# EAGLE board Eval_autorouter (EAGLE 6.6.0)
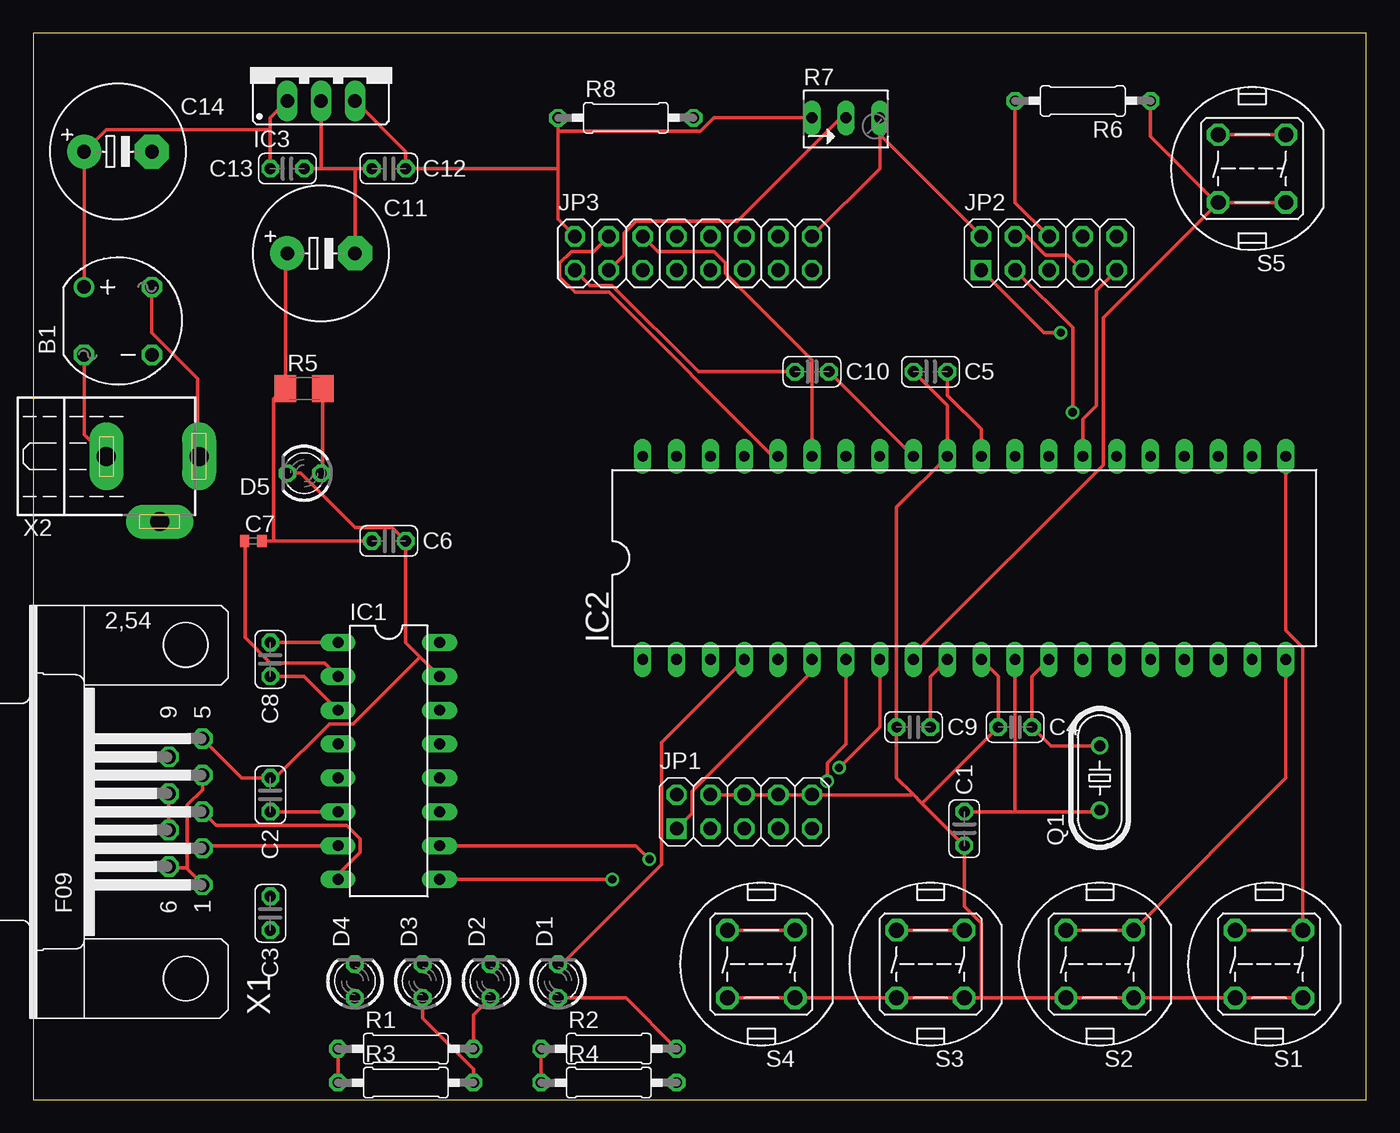
[diagram p0: board, top side]
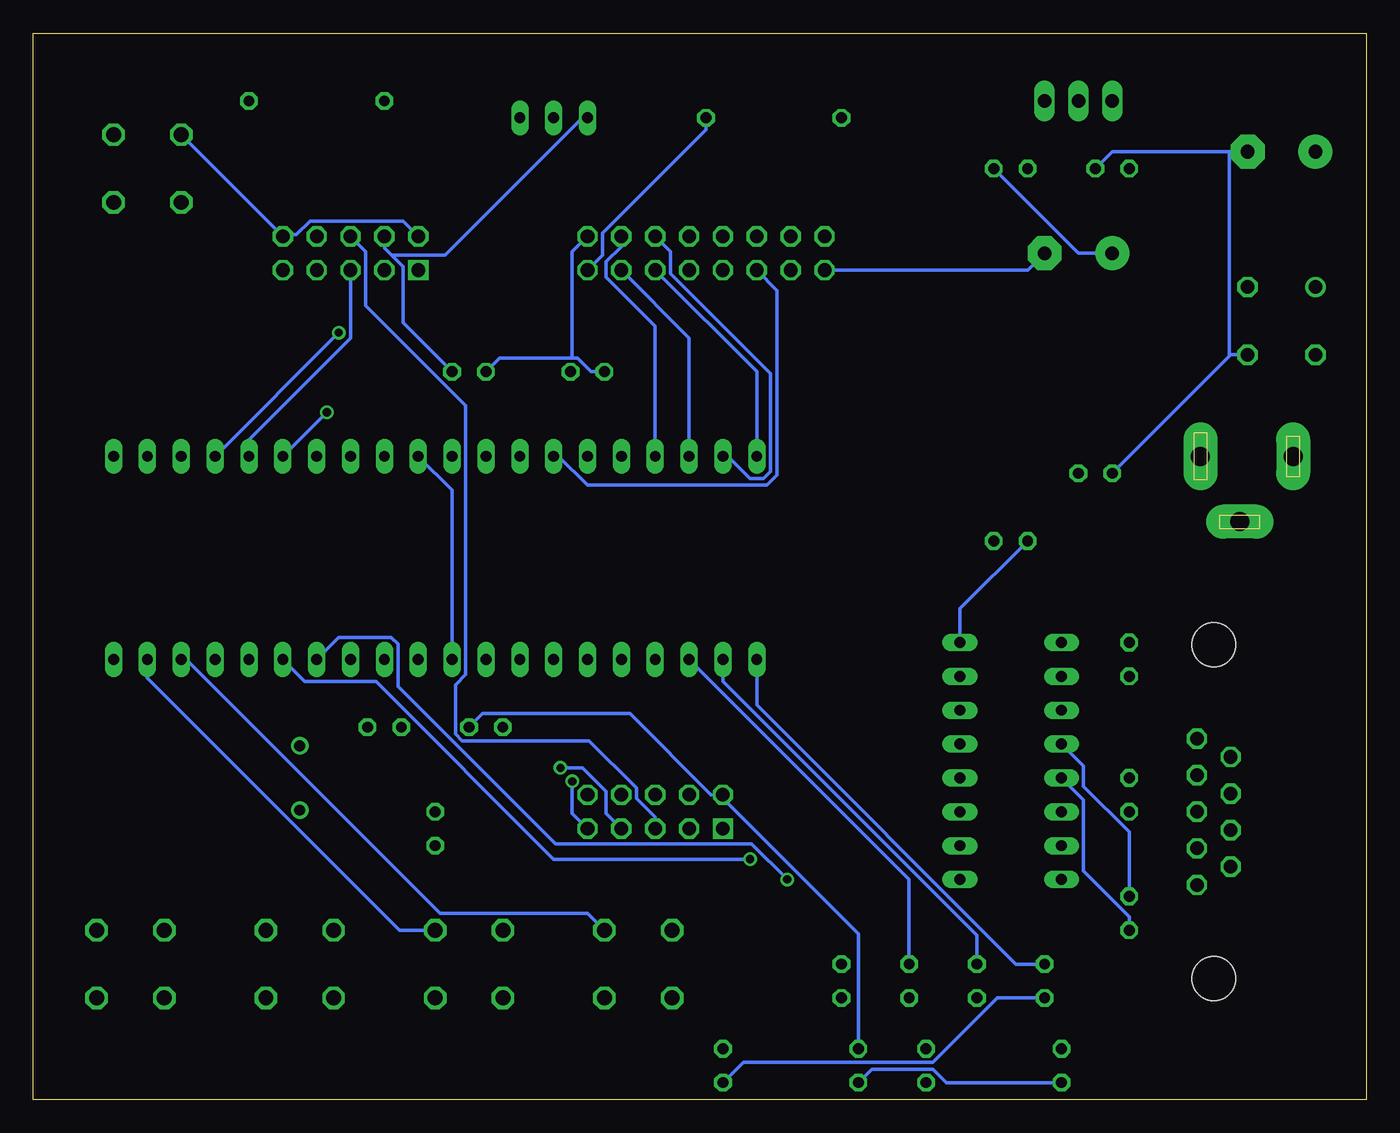
[diagram p1: board, bottom side, seen from below]

Size 100 x 80 mm. Coordinates in mm from the lower left corner, seen from the top.
Outline: 0,0 100,0 100,80 0,80 0,0
Copper layers (1*16): Top 0.035mm / dielectric 1.5mm / Bottom 0.035mm
Design rules "default": minimum track width 10mil, minimum drill 24mil, track to track 8mil, track to pad 8mil, pad to pad 8mil, via to via 8mil, smd to smd 8mil, copper to edge 40mil, drill to drill 8mil, minimum pad ring 10mil, minimum via ring 8mil, stop-mask expansion 4mil, vias tented up to drill 0mil, thermal gap 10mil
Net classes: 1 pup: width 1 mm, drill 0.254 mm

## Footprints (pad centres in the part's own frame; a part is rotated, then mirrored left to right if it is on the bottom)
RB1A = drill 1.016: + -2.54,2.54 | drill 1.016 octagon: - 2.54,-2.54; AC1 2.54,2.54; AC2 -2.54,-2.54
C025-024X044 = drill 0.813 octagon: 1 -1.27,0; 2 1.27,0
C0402 = smd 0.7 x 0.9: 1 -0.65,0; 2 0.65,0
E5-10,5 = drill 1.016 pad 2.54: + -2.54,0 | drill 1.016 pad 2.54 octagon: - 2.54,0
LED3MM = drill 0.813 octagon: A -1.27,0; K 1.27,0
DIL16 = drill 0.813 long: 1 -8.89,-3.81; 2 -6.35,-3.81; 3 -3.81,-3.81; 4 -1.27,-3.81; 5 1.27,-3.81; 6 3.81,-3.81; 7 6.35,-3.81; 8 8.89,-3.81; 9 8.89,3.81; 10 6.35,3.81; 11 3.81,3.81; 12 1.27,3.81; 13 -1.27,3.81; 14 -3.81,3.81; 15 -6.35,3.81; 16 -8.89,3.81
DIL40 = drill 0.813 long: 1 -24.13,-7.62; 2 -21.59,-7.62; 3 -19.05,-7.62; 4 -16.51,-7.62; 5 -13.97,-7.62; 6 -11.43,-7.62; 7 -8.89,-7.62; 8 -6.35,-7.62; 9 -3.81,-7.62; 10 -1.27,-7.62; 11 1.27,-7.62; 12 3.81,-7.62; 13 6.35,-7.62; 14 8.89,-7.62; 15 11.43,-7.62; 16 13.97,-7.62; 17 16.51,-7.62; 18 19.05,-7.62; 19 21.59,-7.62; 20 24.13,-7.62; 21 24.13,7.62; 22 21.59,7.62; 23 19.05,7.62; 24 16.51,7.62; 25 13.97,7.62; 26 11.43,7.62; 27 8.89,7.62; 28 6.35,7.62; 29 3.81,7.62; 30 1.27,7.62; 31 -1.27,7.62; 32 -3.81,7.62; 33 -6.35,7.62; 34 -8.89,7.62; 35 -11.43,7.62; 36 -13.97,7.62; 37 -16.51,7.62; 38 -19.05,7.62; 39 -21.59,7.62; 40 -24.13,7.62
78XXS = drill 1.016 long: GND 0,-2.54; IN -2.54,-2.54; OUT 2.54,-2.54
2X05 = drill 1.016 square: 1 -5.08,-1.27 | drill 1.016 octagon: 2 -5.08,1.27; 3 -2.54,-1.27; 4 -2.54,1.27; 5 0,-1.27; 6 0,1.27; 7 2.54,-1.27; 8 2.54,1.27; 9 5.08,-1.27; 10 5.08,1.27
2X08 = drill 1.016 octagon: 1 -8.89,-1.27; 2 -8.89,1.27; 3 -6.35,-1.27; 4 -6.35,1.27; 5 -3.81,-1.27; 6 -3.81,1.27; 7 -1.27,-1.27; 8 -1.27,1.27; 9 1.27,-1.27; 10 1.27,1.27; 11 3.81,-1.27; 12 3.81,1.27; 13 6.35,-1.27; 14 6.35,1.27; 15 8.89,-1.27; 16 8.89,1.27
HC49/S = drill 0.813: 1 -2.413,0; 2 2.413,0
0207/10@1 = drill 0.813 octagon: 1 -5.08,0; 2 5.08,0
M1206 = smd 1.6 x 2: 1 -1.4,0; 2 1.4,0
B64Y = drill 0.813 long: A 2.54,0; E -2.54,0; S 0,0
DTE6 = drill 1.118 octagon: 1 -2.54,2.54; 2 2.54,2.54; 3 2.54,-2.54; 4 -2.54,-2.54
F09H = drill 1.016 octagon: 1 -5.486,-1.27; 2 -2.743,-1.27; 3 0,-1.27; 4 2.743,-1.27; 5 5.486,-1.27; 6 -4.115,1.27; 7 -1.372,1.27; 8 1.372,1.27; 9 4.115,1.27 | hole 3.302: -12.522,0; 12.522,0
NEB21R = drill 1.422 pad 2.54 long: + 0,7.35; - 0,0.398; C 4.9,4.4

## Placement (x,y rotation side)
B1  [RB1A]  6.35,58.42 0 top
C1  33pF  [C025-024X044]  69.85,20.32 90 top
C2  100nF  [C025-024X044]  17.78,22.86 270 top
C3  100nF  [C025-024X044]  17.78,13.97 270 top
C4  33pF  [C025-024X044]  73.66,27.94 0 top
C5  100nF  [C025-024X044]  67.31,54.61 0 top
C6  100nF  [C025-024X044]  26.67,41.91 0 top
C7  100nF  [C0402]  16.51,41.91 0 top
C8  100nF  [C025-024X044]  17.78,33.02 270 top
C9  100nF  [C025-024X044]  66.04,27.94 0 top
C10  100nF  [C025-024X044]  58.42,54.61 0 top
C11  470u/25V  [E5-10,5]  21.59,63.5 0 top
C12  100nF  [C025-024X044]  26.67,69.85 0 top
C13  100nF  [C025-024X044]  19.05,69.85 180 top
C14  470u/25V  [E5-10,5]  6.35,71.12 0 top
D1  Red  [LED3MM]  39.37,8.89 90 top
D2  Red  [LED3MM]  34.29,8.89 90 top
D3  Red  [LED3MM]  29.21,8.89 90 top
D4  Red  [LED3MM]  24.13,8.89 90 top
D5  Green  [LED3MM]  20.32,46.99 180 top
IC1  MAX232  [DIL16]  26.67,25.4 270 top
IC2  MEGA16-P  [DIL40]  69.85,40.64 0 top
IC3  7805  [78XXS]  21.59,77.47 0 top
JP1  2x5  [2X05]  53.34,21.59 0 top
JP2  2x5  [2X05]  76.2,63.5 0 top
JP3  2x8  [2X08]  49.53,63.5 0 top
Q1  16MHz  [HC49/S]  80.01,24.13 90 top
R1  220R  [0207/10@1]  27.94,3.81 0 top
R2  220R  [0207/10@1]  43.18,3.81 0 top
R3  220R  [0207/10@1]  27.94,1.27 0 top
R4  220R  [0207/10@1]  43.18,1.27 0 top
R5  220R  [M1206]  20.32,53.34 0 top
R6  510R  [0207/10@1]  78.74,74.93 180 top
R7  10k  [B64Y]  60.96,73.66 0 top
R8  22R  [0207/10@1]  44.45,73.66 0 top
S1  DTE6  [DTE6]  92.71,10.16 180 top
S2  DTE6  [DTE6]  80.01,10.16 180 top
S3  DTE6  [DTE6]  67.31,10.16 180 top
S4  DTE6  [DTE6]  54.61,10.16 180 top
S5  DTE6  [DTE6]  91.44,69.85 180 top
X1  [F09H]  11.43,21.59 90 top
X2  [NEB21R]  5.08,48.26 270 top

## Library data of the parts
B1 = rectifier
C1-C14 R1-R6 R8 = rcl
D1-D5 = led
IC1 = maxim
IC2 = avr
IC3 = v-reg
JP1-JP3 = pinhead
Q1 = crystal
R7 = pot
S1-S5 = switch-misc
X1 = con-subd
X2 = con-lumberg

## Nets
+5V: C5.2 C6.1 C7.2 C9.2 C11.+ C12.2 IC1.16 IC2.10 IC2.30 IC3.OUT JP1.2 JP2.4 JP2.7 JP3.2 R1.1 R2.1 R3.1 R4.1 R5.1 R7.E R8.1
/RESET: IC2.9 R6.1 S5.1 S5.2
/RESET_ISP: JP1.5 JP2.6 R6.2
DB4: IC2.40 JP3.11
DB5: IC2.39 JP3.12
DB6: IC2.38 JP3.13
DB7: IC2.37 JP3.14
E: IC2.35 JP3.6
GND: B1.- C1.1 C2.1 C4.1 C5.1 C6.2 C9.1 C10.1 C11.- C12.1 C13.1 C14.- D5.K IC1.15 IC2.11 IC2.31 IC3.GND JP1.4 JP1.6 JP1.8 JP1.10 JP2.2 JP2.10 JP3.1 JP3.16 R7.A S1.1 S1.2 S2.1 S2.2 S3.1 S3.2 S4.1 S4.2 S5.3 S5.4 X1.5
LED0: D4.K IC2.1
LED1: D3.K IC2.2
LED2: D2.K IC2.3
LED3: D1.K IC2.4
LED-A: JP3.15 R8.2
MISO: IC2.7 JP1.9
MOSI: IC2.6 JP1.1
N$1: D4.A R4.2
N$2: D3.A R3.2
N$3: D2.A R1.2
N$4: D1.A R2.2
N$5: C10.2 IC2.32
N$8: C2.2 IC1.6
N$9: C7.1 IC1.2
N$21: C3.2 IC1.5
N$23: C3.1 IC1.4
N$24: C8.2 IC1.3
N$25: C8.1 IC1.1
N$29: C4.2 IC2.13 Q1.2
N$30: C1.2 IC2.12 Q1.1
N$44: X1.1 X1.4 X1.6
N$45: D5.A R5.2
N$46: B1.AC2 X2.-
N$47: X1.7 X1.8
N$68: B1.AC1 X2.+
N$73: B1.+ C13.2 C14.+ IC3.IN
R/W: IC2.34 JP3.5
RS: IC2.36 JP3.4
RS232-RX0: IC1.8 X1.3
RS232-TX0: IC1.7 X1.2
RXD0: IC1.9 IC2.14
SCK: IC2.8 JP1.7
SW4: IC2.18 S4.3 S4.4
SW5: IC2.19 S3.3 S3.4
SW6: IC2.20 S2.3 S2.4
SW7: IC2.21 S1.3 S1.4
TCK: IC2.24 JP2.1
TDI: IC2.27 JP2.9
TDO: IC2.26 JP2.3
TMS: IC2.25 JP2.5
TXD0: IC1.10 IC2.15
V0: JP3.3 R7.S

## Tracks (layer width: path | path; a pad name or v marks a point on that pad's centre or on a via)
+5V
  Top 0.254: C6.1 18.03,41.91 | 18.03,41.91 C7.2 | C11.+ 18.92,63.37 R5.1 18.8,53.34 18.03,52.58 18.03,41.91 | IC3.OUT 27.94,71.12 C12.2 39.37,69.85 | 39.37,69.85 39.37,66.04 JP3.2 | 39.37,69.85 39.37,72.64 | 39.37,72.64 R8.1 | R7.E 51.05,73.66 50.04,72.64 39.37,72.64 | R1.1 R3.1 | R2.1 R4.1 | JP2.4 74.55,64.77 75.95,63.37 77.6,63.37 JP2.7 | C9.2 67.31,31.75 IC2.10 | C5.2 68.58,52.83 71.12,50.29 IC2.30
  Bottom 0.254: IC1.16 30.48,36.83 C6.1 | C11.+ 21.59,63.5 C12.2 | R2.1 38.1,12.45 48.26,22.61 JP1.2 49.15,22.86 55.24,28.96 66.29,28.96 C9.2 | R3.1 31.5,1.27 32.51,2.29 37.08,2.29 R4.1 | IC2.10 68.58,45.72 IC2.30 | JP2.4 73.66,63.88 73.09,63.31 | 73.09,63.31 72.26,62.48 72.26,58.29 C5.2 | R7.E 58.8,73.66 69.09,63.37 73.03,63.37 73.09,63.31
/RESET
  Top 0.254: IC2.9 66.04,33.4 80.26,47.62 80.26,58.67 S5.2 | R6.1 83.82,72.26 88.77,67.31 S5.2 | S5.2 S5.1
/RESET_ISP
  Top 0.254: R6.2 73.66,67.31 JP2.6
  Bottom 0.254: JP1.5 53.34,21.21 54.74,22.61 54.74,23.37 58.29,26.92 67.82,26.92 68.33,27.43 68.33,31.11 67.56,31.88 67.56,52.07 75.06,59.56 75.06,63.63 JP2.6
DB4
  Bottom 0.254: IC2.40 45.72,54.61 JP3.11
DB5
  Bottom 0.254: IC2.39 47.88,48.26 46.23,46.61 45.21,46.61 44.7,47.12 44.7,54.48 52.2,61.98 52.2,63.63 JP3.12
DB6
  Bottom 0.254: IC2.38 50.8,57.15 JP3.13
DB7
  Bottom 0.254: IC2.37 53.34,58.04 57.02,61.72 57.02,62.87 55.88,64.01 JP3.14
E
  Top 0.254: IC2.35 58.42,55.5 51.94,61.98 51.94,62.74 51.05,63.63 46.86,63.63 JP3.6
GND
  Top 0.254: JP1.4 JP1.6 JP1.8 JP1.10 65.91,22.86 65.98,22.92 | IC2.11 72.39,31.75 C4.1 66.67,22.23 | 66.67,22.23 C1.1 69.85,14.48 71.12,13.21 71.12,7.62 | 66.67,22.23 65.98,22.92 | 65.98,22.92 64.77,24.13 C9.1 64.77,44.45 IC2.31 68.58,52.07 C5.1 | S1.1 S1.2 S2.1 S2.2 71.12,7.62 | S4.2 S4.1 S3.2 S3.1 71.12,7.62 | S5.3 S5.4 | 63.5,72.39 63.5,69.85 JP3.16 | 63.5,72.39 JP2.2 | 63.5,72.39 R7.A | C12.1 24.13,69.85 | 24.13,69.85 21.59,69.85 | 21.59,69.85 C13.1 | 21.59,69.85 IC3.GND | 24.13,69.85 C11.- | X1.5 12.7,27.05 15.62,24.13 C2.1 18.16,24.13 22.23,28.19 24,28.19 29.02,33.21 | IC1.15 29.02,33.21 | 29.02,33.21 27.94,34.29 C6.2 26.92,42.93 24.13,42.93 20.07,46.99 D5.K | C10.1 49.91,54.61 43.43,61.09 41.78,61.09 JP3.1
  Bottom 0.254: S5.3 JP2.10 81.28,64.9 80.26,64.9 79.25,65.91 72.26,65.91 JP2.2 | C10.1 58.17,54.61 59.18,55.63 59.56,55.63 | 59.56,55.63 65.02,55.63 C5.1 | 59.56,55.63 59.56,63.63 JP3.16 | JP3.1 25.4,62.23 C11.- | 10.29,71.12 19.05,71.12 C13.1 | 10.29,71.12 C14.- | B1.- 10.16,55.88 10.22,55.82 | D5.K 10.22,55.82 | 10.29,71.12 10.29,55.88 10.22,55.82
LED0
  Bottom 0.254: D4.K 26.29,10.16 45.72,29.59 IC2.1
LED1
  Bottom 0.254: D3.K 29.21,12.32 48.26,31.37 IC2.2
LED2
  Bottom 0.254: D2.K 34.29,16.51 IC2.3
LED3
  Top 0.254: D1.K 39.62,10.16 47.12,17.65 47.12,26.8 IC2.4
LED-A
  Bottom 0.254: R8.2 49.53,72.77 57.28,65.02 57.28,63.37 JP3.15
MISO  (via drill 0.61)
  Top 0.254: IC2.7 60.96,26.67 59.56,25.27 v59.56,23.88
  Bottom 0.254: v59.56,23.88 59.56,21.46 JP1.9
MOSI
  Top 0.254: IC2.6 58.42,32.13 49.4,23.11 49.4,21.46 JP1.1
N$1
  Bottom 0.254: D4.A 27.69,7.62 32.51,2.79 46.74,2.79 R4.2
N$2
  Top 0.254: R3.2 33.02,2.29 29.21,6.1 D3.A
N$3
  Top 0.254: R1.2 33.02,6.35 D2.A
N$4
  Top 0.254: D1.A 44.45,7.62 R2.2
N$5
  Top 0.254: IC2.32 C10.2
N$8
  Top 0.254: IC1.6 C2.2
N$9
  Top 0.254: IC1.2 21.84,32.77 17.78,32.77 15.88,34.67 15.88,41.91 C7.1
N$21
  Bottom 0.254: C3.2 17.78,13.72 21.21,17.14 21.21,22.48 IC1.5
N$23
  Bottom 0.254: C3.1 17.78,20.07 21.21,23.5 21.21,25.02 IC1.4
N$24
  Top 0.254: C8.2 20.32,31.75 IC1.3
N$25
  Top 0.254: IC1.1 C8.1
N$29
  Top 0.254: IC2.13 74.93,31.75 C4.2 76.33,26.54 Q1.2
N$30
  Top 0.254: 73.66,21.59 79.88,21.59 Q1.1 | 73.66,21.59 C1.2 | 73.66,21.59 IC2.12
N$44
  Top 0.254: 11.49,17.34 12.7,16.13 X1.1 | 11.49,17.34 11.43,17.4 10.16,17.4 X1.6 | X1.4 12.7,23.24 11.56,22.1 11.56,17.4 11.49,17.34
N$45
  Top 0.254: D5.A 21.72,47.12 R5.2
N$46
  Top 0.254: B1.AC2 3.81,49.91 5.46,48.26 X2.-
N$47
  Top 0.254: X1.8 X1.7
N$68
  Top 0.254: B1.AC1 8.89,57.53 12.32,54.1 12.32,48.26 X2.+
N$73
  Top 0.254: 17.78,72.77 17.78,73.66 IC3.IN | 17.78,72.77 C13.2 | B1.+ C14.+ 5.46,72.77 17.78,72.77
R/W
  Bottom 0.254: IC2.34 60.58,48.26 58.42,46.1 44.96,46.1 44.2,46.86 44.2,60.71 JP3.5
RS
  Top 0.254: IC2.36 55.5,48.26 43.18,60.58 40.64,60.58 39.5,61.72 39.5,62.74 40.39,63.63 42.04,63.63 JP3.4
RS232-RX0
  Top 0.254: IC1.8 22.86,16.89 24.51,18.54 24.51,19.56 23.5,20.57 13.72,20.57 X1.3
RS232-TX0
  Top 0.254: IC1.7 12.83,19.05 12.7,18.92 X1.2
RXD0  (via drill 0.61)
  Top 0.254: v43.43,16.51 IC1.9
  Bottom 0.254: v43.43,16.51 46.1,19.18 60.83,19.18 72.64,30.99 72.64,34.16 73.15,34.67 77.09,34.67 IC2.14
SCK  (via drill 0.61)
  Top 0.254: IC2.8 63.5,27.94 v60.45,24.89
  Bottom 0.254: v60.45,24.89 58.8,24.89 57.02,23.11 57.02,21.46 JP1.7
SW4
  Top 0.254: S4.4 S4.3
  Bottom 0.254: IC2.18 88.52,33.02 69.47,13.97 58.42,13.97 S4.4
SW5
  Top 0.254: S3.4 S3.3
  Bottom 0.254: IC2.19 91.44,31.62 72.52,12.7 S3.4
SW6
  Top 0.254: IC2.20 93.98,24.13 S2.4 S2.3
SW7
  Top 0.254: IC2.21 93.98,35.18 95.25,33.91 S1.4 S1.3
TCK  (via drill 0.61)
  Top 0.254: v77.09,57.53 75.82,57.53 JP2.1
  Bottom 0.254: v77.09,57.53 IC2.24
TDI
  Top 0.254: IC2.27 78.74,51.05 79.76,52.07 79.76,60.71 JP2.9
TDO  (via drill 0.61)
  Top 0.254: v77.98,51.56 77.98,57.91 JP2.3
  Bottom 0.254: v77.98,51.56 IC2.26
TMS
  Bottom 0.254: IC2.25 83.82,49.53 76.2,57.15 JP2.5
TXD0  (via drill 0.61)
  Top 0.254: IC1.10 45.21,19.05 v46.23,18.03
  Bottom 0.254: v46.23,18.03 60.96,18.03 74.3,31.37 79.63,31.37 IC2.15
V0
  Top 0.254: R7.S 60.58,73.66 52.83,65.91 45.21,65.91 44.32,65.02 44.32,63.37 JP3.3